# Altium PCB PCB_Oxi_VT0.1-991023.PcbDoc
Units mm, origin at the board's own origin, x right, y up, seen from the top; angles counter-clockwise.
Board outline 53 x 27 mm, 2 copper layers (Top Layer, Bottom Layer); 60 components, 54 nets, 264 pads, 84 vias.
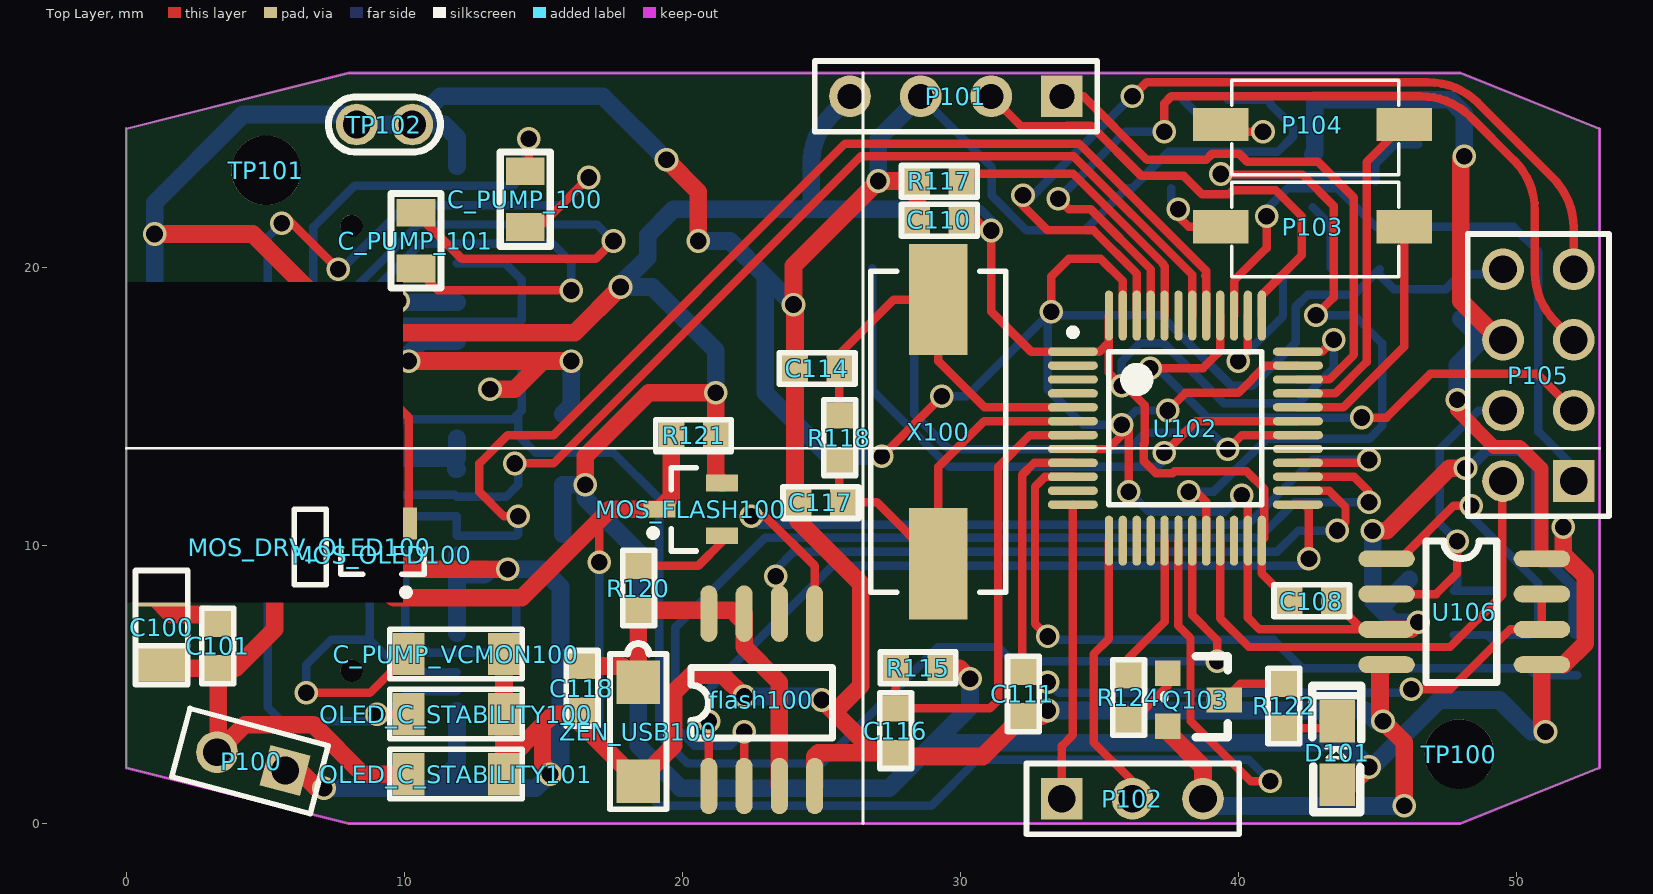
[diagram p0: Top Layer view]
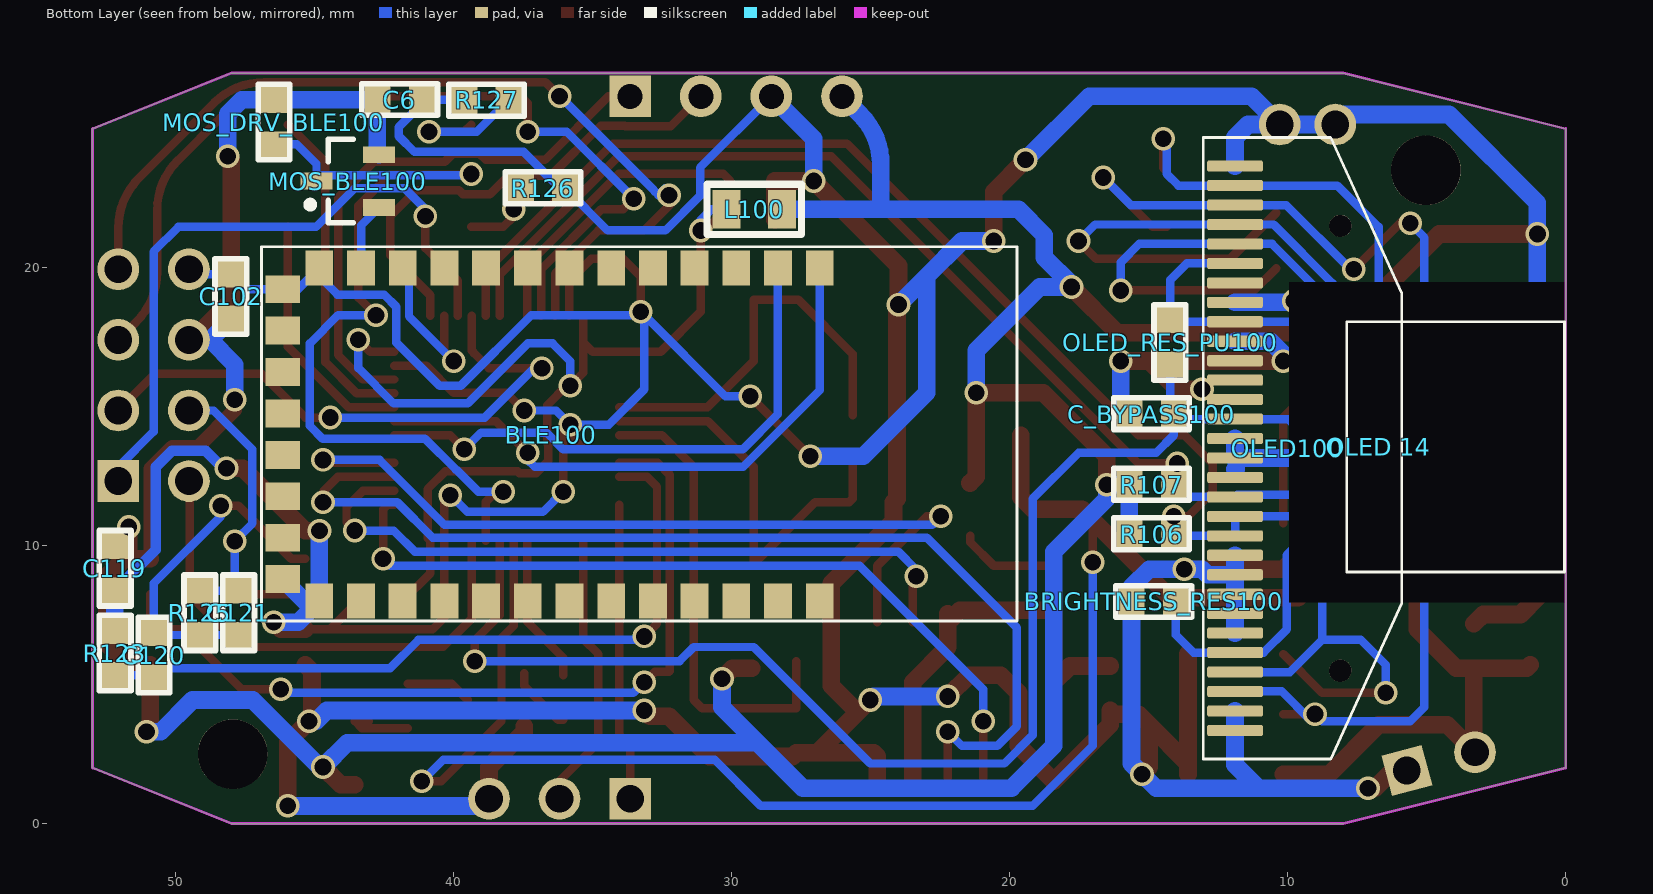
[diagram p1: Bottom Layer view, seen from below]

## Layer stack, top to bottom
Top Solder: solder mask 0.0102, Solder Resist, Dk 3.5
Top Layer: signal copper 0.0356
Dielectric 1: dielectric 0.32, FR-4, Dk 4.8
Bottom Layer: signal copper 0.0356
Bottom Solder: solder mask 0.0102, Solder Resist, Dk 3.5

## Board outline
0,2 8,0 48,0 53,2 53,25 48,27 8,27 0,25

## Design rules (kind name [scope] priority, off if disabled: settings)
AssemblyTestPointUsage [All] p1 off:
AssemblyTestpoint [All] p1 off: testpointundercomponent=TRUE minsize=1.016 maxsize=2.54 preferedsize=1.524 minholesize=0 maxholesize=1.016 preferedholesize=0.813 testpointgrid=0.025 usegrid=TRUE gridtolerance=0 allowsidetop=TRUE allowsidebottom=TRUE
Clearance [All] p1: gap=0.152 ignorepadtopadclearanceinfootprint=FALSE
ComponentClearance "OLED Clearance" [InComponent('OLED100') vs InComponent('OLED 14')] p1: gap=-2.54 collisioncheckmode=3 verticalgap=2540 showdistances=FALSE // OLED Rev diffrences
ComponentClearance [All] p2 off: gap=0.254 collisioncheckmode=3 verticalgap=0.254 showdistances=TRUE
FabricationTestPointUsage [All] p1 off: valid=0 allowmultiple=FALSE
FabricationTestpoint [All] p1 off: side=3 testpointundercomponent=TRUE minsize=1.016 maxsize=2.54 preferedsize=1.524 minholesize=0 maxholesize=1.016 preferedholesize=0.813 testpointgrid=0.025 allowsidetop=TRUE allowsidebottom=TRUE usegrid=TRUE gridtolerance=0
HoleSize [All] p1 off: absolutevalues=TRUE maxlimit=2.54 minlimit=0.025 maxpercent=80.000 minpercent=20.000
HoleToHoleClearance [All] p1 off: gap=0.254 allowstackedmicrovias=TRUE
LayerPairs [All] p1 off: enforce=TRUE
MinimumSolderMaskSliver [All] p1 off: minsoldermaskwidth=0.254
NetAntennae [All] p1 off: netantennaetolerance=0
PolygonConnect [All] p1: connectstyle=Relief reliefconductorwidth=0.254 reliefentries=4 polygonreliefangle="90 Angle" airgapwidth=0.254
RoutingVias [All] p1: holewidth=0.6 width=0.85 viastyle="Through Hole" minholewidth=0.6 minwidth=0.85 maxholewidth=0.6 maxwidth=0.85
SilkToSilkClearance [All] p1 off: silktosilkclearance=0.254
SilkToSolderMaskClearance [IsPad] p1 off: minsilkscreentomaskgap=0.254 clearancetoexposedcopper=TRUE
SolderMaskExpansion [All] p1: expansion=0.102
Width [All] p1: maxlimit=2.54 minlimit=0.254 preferedwidth=1.27
18 further rules are at their usual default settings.

## Components (designator, comment, footprint, x,y, rotation, side; value= is the part's Value field where it differs from the comment)
BLE100 "HM-16" HM-16 19.738,20.493 r270 bottom locked
BRIGHTNESS_RES100 "Res3" 0603-2 14.021,8.001 r0 bottom value=390k
C6 "1uF" 0603-2 42.748,26.035 r180 bottom
C100 "47UF 16V(B)SMD" CAP-A 1.27,5.715 r90 top
C101 "100nF" 0603-2 3.302,5.588 r90 top
C102 "100nF" 0603-2 48.006,18.161 r90 bottom
C108 "100nF" 0603-2 41.848,8.001 r0 top
C110 "100nF" 0603-2 30.048,21.717 r180 top
C111 "10nF" 0603-2 32.258,5.461 r270 top
C114 "20pF" 0603-2 25.654,16.383 r180 top
C116 "100nF" 0603-2 27.686,2.54 r90 top value=100pF
C117 "20pF" 0603-2 25.781,11.557 r180 top
C118 "100nF" 0603-2 16.383,5.664 r270 top
C119 "100nF" 0603-2 52.197,9.982 r270 bottom
C120 "1uF" 0603-2 50.8,6.858 r270 bottom
C121 "10pF" 0603-2 47.752,8.382 r270 bottom
C_BYPASS100 "Cap Semi" 0603-2 15.697,14.732 r180 bottom value=10uF
C_PUMP_100 "Cap Semi" 0805-2 14.351,21.463 r90 top value=1uF
C_PUMP_101 "Cap Semi" 0805-2 10.414,19.971 r90 top value=1uF
C_PUMP_VCMON100 "Cap Semi" 1206-2 10.16,6.096 r0 top value=10uF
D101 "LED (0805) B" 0805D 43.561,1.397 r90 top
flash100 "W25Q16BVSSIG" "SO-8 - editted" 20.955,1.549 r90 top
L100 "EBLS2012-101K" 0805-2 28.194,22.098 r0 bottom
MOS_BLE100 "FDN360P" SOT23_N 43.815,23.114 r0 bottom
MOS_DRV_BLE100 "10K" 0603-2 46.482,26.035 r270 bottom value=1K
MOS_DRV_OLED100 "10K" 0603-2 6.604,10.744 r270 top value=1K
MOS_FLASH100 "FDN360P" SOT23_N 20.302,11.303 r180 top
MOS_OLED100 "FDN360P" SOT23_N 9.21,9.67 r270 top
OLED100 "OLED" OLED0.96 10,13.5 r90 bottom locked
"OLED 14" "OLED(14pin)" OLED0.91_NO3D 6.731,17.578 r270 bottom locked
OLED_C_STABILITY100 "Cap Semi" 1206-2 10.16,3.937 r0 top value=10uF
OLED_C_STABILITY101 "Cap Semi" 1206-2 10.16,1.778 r0 top value=10uF
OLED_RES_PU100 "Res3" 0603-2 14.224,16.51 r90 bottom value=4.7k
P100 "Header 2" A_HDR1X2 5.715,1.905 r165 top
P101 "Header 4" HDR1X4 33.655,26.162 r180 top
P102 "Header 3" A_HDR1X3_editted 33.655,0.889 r0 top
P103 "Header 2" TACT-1 46.076,21.463 r180 top
P104 "Header 2" TACT-1 46.072,25.146 r180 top
P105 "Header 4X2H" HDR2X4_edited 52.07,12.319 r90 top
Q103 "BC817" SOT23 37.465,5.512 r270 top
R106 "10K" 0603-2 15.697,10.414 r180 bottom value=1K
R107 "10K" 0603-2 15.697,12.192 r180 bottom value=1K
R115 "10K" 0603-2 27.686,5.588 r0 top value=1K
R117 "10K" 0603-2 30.048,23.114 r180 top value=1K
R118 "1meg" 0603-2 25.654,14.681 r270 top value=1K
R120 "22" 0603-2 18.415,9.271 r270 top value=1K
R121 "10K" 0603-2 21.209,13.97 r180 top value=1K
R122 "100" 0603-2 41.656,3.429 r90 top value=1K
R123 "2.7k" 0603-2 52.197,6.934 r270 bottom
R124 "4.7K" 0603-2 36.068,3.734 r90 top value=1K
R125 "100k" 0603-2 49.149,8.382 r270 bottom
R126 "22" 0603-2 37.592,22.86 r180 bottom
R127 "22" 0603-2 38.024,26.035 r0 bottom
TP100 "HOLE" A_Ert#1 47.777,2.54 r0 top
TP101 "HOLE" A_Ert#2 3.708,24.384 r0 top
TP102 "HOLE" TP_Net 8.287,25.146 r0 top
U102 "STM32F103C8T6" LQFP48_N 38.1,14.224 r0 top locked
U106 "AD8572ARZ" SO-8 45.237,9.525 r0 top
X100 "8MHz" xtal 29.21,14.097 r90 top
ZEN_USB100 "5V" DSMD 18.415,1.524 r90 top

## Footprints (in the part's own frame and the unit in brackets; to place one, negate y for a bottom-side part, rotate by r counter-clockwise, add the part's x,y. Pads: shape width x height; smd on the part's side, far side on the other; paste and mask are expansions set on the pad)
0603-2 [mil]
  rect 37x40 smd: 1(0,0) 2(63,0)
  silkscreen extent -22,-22 85,23, body extent 1,-16 63,16, height 18
0805-2 [mm]
  rect 1x1.4 smd: 1(0,0) 2(2,0)
  silkscreen extent -0.7,-0.9 2.7,0.9, body extent 0,-0.58 2,0.67, height 0.5
0805D [mil]
  rect 60x50 smd: 1(0,0) 2(90,0)
  silkscreen extent -39,-35 140,36, body extent -15,-32 111,31, height 43
1206-2 [mil]
  rect 45x60 smd: 1(0,0) 2(135,0)
  silkscreen extent -27,-35 161,35, body extent 0,-31 122,30, height 22
A_Ert#1 [mm]
  round 2.5 hole 2.5: 1(0.176,-0.04)
A_Ert#2 [mm]
  round 2.5 hole 2.5: 1(1.322,-0.884)
A_HDR1X2 [mm] "Connector; Header; 4 Position"
  rect 1.5x1.5 hole 1: 1(0,0)
  round 1.5 hole 1: 2(2.54,0)
  silkscreen extent -1.27,-1.27 3.89,1.27, body extent -1.32,-1.3 3.76,1.24, height 18.51
A_HDR1X3_editted [mm] "Connector; Header; 4 Position"
  rect 1.5x1.5 hole 1: 1(0,0)
  round 1.5 hole 1: 2(2.54,0) 3(5.08,0)
  silkscreen extent -1.27,-1.27 6.38,1.27, body extent -1.19,-1.35 6.43,1.19, height 9.6
CAP-A [mm]
  rect 1.2x1.7 smd: 1(0,0) 2(2.7,0)
  silkscreen extent -0.71,-0.94 3.39,0.94, body extent -0.08,-0.69 3.12,0.91, height 1
DSMD [mil]
  rect 62x62 smd: 1(0,0) 2(140,0)
  silkscreen extent -40,-40 195,40, body extent 3,-27 149,36, height 63
HDR1X4 [mm] "Connector; Header; 4 Position"
  rect 1.5x1.5 hole 0.9: 1(0,0)
  round 1.5 hole 0.9: 2(2.54,0) 3(5.08,0) 4(7.62,0)
  silkscreen extent -1.27,-1.27 8.89,1.27
HDR2X4_edited [mm] "Connector; Header; 4x2 Position"
  rect 1.5x1.5 hole 1: 1(0,0)
  round 1.5 hole 1: 2(0,2.54) 3(2.54,0) 4(2.54,2.54) 5(5.08,0) 6(5.08,2.54) 7(7.62,0) 8(7.62,2.54)
  silkscreen extent -1.27,-1.27 8.89,3.81, body extent -1.22,-1.19 8.76,3.89, height 9.5
HM-16 [mm]
  rect 1.25x1 smd: 1(0.508,-7.1) 2(0.508,-8.6) 3(0.508,-10.1) 4(0.508,-11.6) 5(0.508,-13.1) 6(0.508,-14.6) 7(0.508,-16.1) 8(0.508,-17.6) 9(0.508,-19.1) 10(0.508,-20.6) 11(0.508,-22.1) 12(0.508,-23.6) 13(0.508,-25.1) 22(12.492,-25.1) 23(12.492,-23.6) 24(12.492,-22.11) 25(12.492,-20.6) 26(12.492,-19.1) 27(12.492,-17.6) 28(12.492,-16.1) 29(12.492,-14.6) 30(12.492,-13.1) 31(12.492,-11.6) 32(12.492,-10.1) 33(12.492,-8.6) 34(12.492,-7.1)
  rect 1x1.25 smd: 14(1.27,-26.416) 15(2.76,-26.416) 16(4.25,-26.416) 17(5.74,-26.416) 18(7.23,-26.416) 19(8.72,-26.416) 20(10.21,-26.416) 21(11.7,-26.416)
  silkscreen extent -0.25,-27.18 13.21,0
LQFP48_N [mm]
  oval 1.8x0.3 smd: 1(-4.05,2.75) 2(-4.05,2.25) 3(-4.05,1.75) 4(-4.05,1.25) 5(-4.05,0.75) 6(-4.05,0.25) 7(-4.05,-0.25) 8(-4.05,-0.75) 9(-4.05,-1.25) 10(-4.05,-1.75) 11(-4.05,-2.25) 12(-4.05,-2.75) 25(4.05,-2.75) 26(4.05,-2.25) 27(4.05,-1.75) 28(4.05,-1.25) 29(4.05,-0.75) 30(4.05,-0.25) 31(4.05,0.25) 32(4.05,0.75) 33(4.05,1.25) 34(4.05,1.75) 35(4.05,2.25) 36(4.05,2.75)
  oval 0.3x1.8 smd: 13(-2.75,-4.05) 14(-2.25,-4.05) 15(-1.75,-4.05) 16(-1.25,-4.05) 17(-0.75,-4.05) 18(-0.25,-4.05) 19(0.25,-4.05) 20(0.75,-4.05) 21(1.25,-4.05) 22(1.75,-4.05) 23(2.25,-4.05) 24(2.75,-4.05) 37(2.75,4.05) 38(2.25,4.05) 39(1.75,4.05) 40(1.25,4.05) 41(0.75,4.05) 42(0.25,4.05) 43(-0.25,4.05) 44(-0.75,4.05) 45(-1.25,4.05) 46(-1.75,4.05) 47(-2.25,4.05) 48(-2.75,4.05)
  silkscreen extent -4.17,-2.75 2.75,3.57
OLED0.91_NO3D [mm]
  rrect50% 0.32x2 smd: 1(0,0) 2(0.62,0) 3(1.24,0) 4(1.86,0) 5(2.48,0) 6(3.1,0) 7(3.72,0) 8(4.34,0) 9(4.96,0) 10(5.58,0) 11(6.2,0) 12(6.82,0) 13(7.44,0) 14(8.06,0)
  silkscreen extent -0.47,-1.14 8.53,6.69
OLED0.96 [mm]
  round 0.8 hole 0.8 unplated: 0(-8,-1.895) 0(8,-1.895)
  rrect30% 0.4x2 smd: 1(10.15,1.895) 2(9.45,1.895) 3(8.75,1.895) 4(8.05,1.895) 5(7.35,1.895) 6(6.65,1.895) 7(5.95,1.895) 8(5.25,1.895) 9(4.55,1.895) 10(3.85,1.895) 11(3.15,1.895) 12(2.45,1.895) 13(1.75,1.895) 14(1.05,1.895) 15(0.35,1.895) 16(-0.35,1.895) 17(-1.05,1.895) 18(-1.75,1.895) 19(-2.45,1.895) 20(-3.15,1.895) 21(-3.85,1.895) 22(-4.55,1.895) 23(-5.25,1.895) 24(-5.95,1.895) 25(-6.65,1.895) 26(-7.35,1.895) 27(-8.05,1.895) 28(-8.75,1.895) 29(-9.45,1.895) 30(-10.15,1.895)
  silkscreen extent -11.18,-4.11 11.18,3.04, body extent -12.84,-4.84 12.86,17.57, height 0.21
SO-8 [mil]
  oval 80x24 smd: 1(4,0) 2(4,-50) 3(4,-100) 4(4,-150) 5(224,-150) 6(224,-100) 7(224,-50) 8(224,0)
  silkscreen extent 60,-175 160,25, body extent -5,-173 239,24, height 69
"SO-8 - editted" [mil]
  oval 80x24 smd: 1(-7.87,0) 2(-7.87,-50) 3(-7.87,-100) 4(-7.87,-150) 5(236.22,-150) 6(236.22,-100) 7(236.22,-50) 8(236.22,0)
  silkscreen extent 60,-175 160,25, body extent -5,-173 239,24, height 69
SOT23 [mil]
  rect 36x36 smd: 1(4,0) 2(79,0)
  rect 36x50 smd: 3(42,80)
  silkscreen extent -20,-5 95,85
SOT23_N [mm] "SOT23, 3-Leads, Body 2.9x1.3mm, Pitch 0.95mm, Lead Span 2.3mm - Reverse Pinning, IPC Medium Density"
  rect 1.15x0.6 smd: 1(1.125,0) 2(-1.125,-0.95) 3(-1.125,0.95)
  silkscreen extent -0.2,-1.5 1.48,1.5, body extent -0.7,-1.5 0.7,1.5, height 1.1
TACT-1 [mm]
  rect 2x1.2 smd: 1(0.102,0) 2(6.702,0)
  silkscreen extent 0.3,-1.6 6.3,1.8, body extent -0.67,-1.77 7.33,1.83, height 2.4
TP_Net [mm]
  round 1.5 hole 1: 0(0,0) 0(2,0)
  silkscreen extent -1.02,-0.99 3.01,0.99
xtal [mm] "Crystal, 2-Leads, Body 4.70x11.40mm, Pitch 8.80mm, IPC Medium Density"
  rect 4x2.1 smd: 1(-4.75,0) 2(4.75,0)
  silkscreen extent -5.77,-2.42 5.77,2.42, body extent -6.35,-2.35 6.35,2.35, height 4.2

## Part data
BRIGHTNESS_RES100 OLED_RES_PU100: "Resistor", LatestRevisionDate=29-May-2009, LatestRevisionNote="IPC-7351 Footprint Added.", PackageDescription="Chip Resistor", PackageReference=J1-0603, Published=8-Jun-2000, Publisher="Altium Limited"
C6 C101 C102 C108 C110 C111 C114 C116 C117 C118 C119 C120 C121: library part CAP, "Capacitor"
  C116: Published=8-Jun-2000, Publisher="Altium Limited", Revision="July-2002: Re-released for DXP Platform."
C100: library part CAPACITOR, "TAJD106M035RNJ"
C_BYPASS100 C_PUMP_100 C_PUMP_101 C_PUMP_VCMON100 OLED_C_STABILITY100 OLED_C_STABILITY101: "Capacitor (Semiconductor SIM Model)", LatestRevisionDate=29-May-2009, LatestRevisionNote="IPC-7351 Footprint Added.", PackageDescription="Chip Capacitor", PackageReference=C1206, Published=8-Jun-2000, Publisher="Altium Limited"
D101: library part LED3, "Typical BLUE SiC LED", PackageDocument=16-Apr-2002, DatasheetDocument=16-Apr-2002, LatestRevisionDate=17-Dec-2003, LatestRevisionNote="PCB Footprint replaced.", PackageReference=3.5X2.8X1.9, Published=8-Jun-2000, Publisher="Altium Limited"
flash100: "FLASH - NOR Memory IC 16Mb _2M x 8_ SPI 104MHz 8-SOIC", Package="SOIC-8 Winbond", Availability=Unavailable, MF=Winbond, MP=W25Q16BVSSIG, Price=None, SnapEDA_Link=https://www.snapeda.com/parts/W25Q16BVSSIG/Winbond%20Electronics/view-part/512685/?ref=snap
L100: library part INDUCTOR, "Inductor 100UH (0805)", GLFR1608T100M-LR=10UH
MOS_BLE100 MOS_FLASH100 MOS_OLED100: library part MOSFET-P, "P-Channel MOSFET", LatestRevisionDate=17-Jul-2002, LatestRevisionNote="Re-released for DXP Platform.", PackageDescription="TO, Flat Index; 3 In-Line, Axial Leads; Body Dia. 4.6mm; Lead Dia. 0.5 mm (max)", PackageReference=E3, PackageVersion=1995/1996, Published=8-Jun-2000, Publisher="Altium Limited"
MOS_DRV_BLE100 MOS_DRV_OLED100 R115 R120 R121: library part res1, "Resistor", Published=8-Jun-2000, Publisher="Altium Limited", Revision="July-2002: Re-released for DXP Platform."
OLED100: library part OLED0.96
P100 P103 P104: "Header, 2-Pin", LatestRevisionDate=17-Jul-2002, LatestRevisionNote="Re-released for DXP Platform.", Publisher="Altium Limited"
P101: "Header, 4-Pin", LatestRevisionDate=17-Jul-2002, LatestRevisionNote="Re-released for DXP Platform.", Publisher="Altium Limited"
P102: "Header, 3-Pin", LatestRevisionDate=17-Jul-2002, LatestRevisionNote="Re-released for DXP Platform.", Publisher="Altium Limited"
P105: "Header, 4-Pin, Dual row, Right Angle", LatestRevisionDate=17-Jul-2002, LatestRevisionNote="Re-released for DXP Platform.", Publisher="Altium Limited"
Q103: library part 2N3904, "NPN General Purpose Amplifier", ComponentLink1Description="Manufacturer Link", ComponentLink1URL=http://www.fairchildsemi.com/, ComponentLink2Description=Datasheet, ComponentLink2URL=http://www.fairchildsemi.com/ds/2N%2F2N3904.pdf, DatasheetVersion=1997, LatestRevisionDate=15-Jan-2003, LatestRevisionNote="PCB Footprint 'BCY-W3/D4.7' replaced", PackageDescription="TO, Flat Index; 3 In-Line, Axial Leads; Body Dia. 4.5mm; Leads 0.51 x 0.48 mm (max)", PackageReference=TO-92A, PackageVersion=Sep-1998, Published=8-Jun-2000, Publisher="Altium Limited"
R106 R107 R117 R118 R122 R124: library part Res1, "Resistor", Published=8-Jun-2000, Publisher="Altium Limited", Revision="July-2002: Re-released for DXP Platform."
R123 R125 R126 R127: library part RES1
TP100 TP101 TP102: library part TP
U102: "STM32 ARM-based 32-bit MCU with 64 Kbytes Flash, 48-pin LQFP, Industrial Temperature"
U106: library part NJM3404
X100: library part CRYSTAL, "NTK-8.000000-HC49US"
ZEN_USB100: library part ZENER

## Free pads (board coordinates)
  round 0 hole 11.5 square: "OLED Hole"(4.191,13.716)

## Via types
v1: diameter 0.85, hole 0.6, Top Layer to Bottom Layer, 84 vias

## Nets (pads, with @x,y where several pads share a name; then routed paths per layer and width w, separated by ;. In a path a pad name is that pad's centre, name@x,y a point inside that pad or via, vN(x,y) a via of type N, cw(c..) or ccw(c..) an arc to the next point about the centre after c; other vN are vias at no path point)
BOOT0: R117.1 U102.44 | length 10.6
  Top Layer w0.305: R117.1 30.302,23.368 34.072,23.368 37.307,20.133 37.307,20.097 37.35,20.054 U102.44
BUILTIN_LED: R124.2 U102.17 | length 5.4
  Top Layer w0.305: R124.2 36.068,5.969 37.35,7.251 U102.17
CPU_RXD: P102.2 U102.13 | length 10.1
  Top Layer w0.305: U102.13 35.35,6.648 34.798,6.096 34.798,2.921 36.195,1.524 P102.2
CPU_TXD: P102.1 U102.12 | length 10.7
  Top Layer w0.305: P102.1 33.655,2.794 34.05,3.189 U102.12
CS_FLASH: flash100.1 U102.25 | length 29
  Top Layer w0.305: flash100.1@20.955,1.651 v1(20.955,3.683) ; U102.25 42.374,11.474 42.545,11.303 v1(42.545,9.525)
  Bottom Layer w0.305: v1(20.955,3.683) 20.955,4.826 25.403,9.274 26.338,9.274 26.341,9.271 42.291,9.271 v1(42.545,9.525)
DAC_Sync_1: P105.5 U102.45 | length 32.5
  Top Layer w0.305: v1(33.528,22.479) 33.909,22.098 34.695,22.098 36.85,19.943 U102.45 ; v1(37.338,24.892) 37.338,25.908 37.592,26.162 46.573,26.162 cw(c46.573,23.622) 47.48,25.995 cw(c46.573,23.622) 48.369,25.418 49.929,23.858 cw(c48.133,22.062) 50.673,22.062 50.673,19.848 ccw(c53.213,19.848) 51.417,18.052 P105.5
  Bottom Layer w0.305: v1(33.528,22.479) 35.941,24.892 v1(37.338,24.892)
DAC_Sync_2: P105.7 U102.46 | length 32.9
  Top Layer w0.305: v1(32.258,22.606) 32.258,22.479 32.131,22.352 33.147,21.336 34.798,21.336 36.35,19.784 U102.46 ; v1(36.195,26.162) 36.703,26.67 46.827,26.67 cw(c46.827,24.13) 48.623,25.926 51.326,23.223 cw(c49.53,21.427) 52.07,21.427 P105.7
  Bottom Layer w0.305: v1(32.258,22.606) 32.258,22.733 32.385,22.86 32.639,22.606 32.798,22.765 32.798,22.781 36.179,26.162 v1(36.195,26.162)
DAC_Sync_3: P105.2 U102.21 | length 18.3
  Top Layer w0.305: U102.21 39.35,7.386 40.386,6.35 47.625,6.35 49.505,8.23 49.505,12.294 P105.2
f_MISO: flash100.2 U102.27 | length 38.2
  Top Layer w0.305: flash100.2@22.225,1.651 v1(22.225,3.302) ; U102.27 44.168,12.474 44.704,11.938 v1(44.704,11.557)
  Bottom Layer w0.305: v1(22.225,3.302) 21.717,2.794 20.447,2.794 19.748,3.492 19.748,7.048 22.987,10.287 40.767,10.287 42.037,11.557 v1(44.704,11.557)
f_MOSI: flash100.5 U102.28 | length 31
  Top Layer w0.305: v1(22.479,11.049) 22.987,11.049 24.765,9.271 flash100.5 flash100.5@24.765,7.239 ; U102.28 44.597,12.974 v1(44.704,13.081)
  Bottom Layer w0.305: v1(22.479,11.049) 22.784,10.744 40.335,10.744 42.672,13.081 v1(44.704,13.081)
f_SCK: flash100.6 U102.26 | length 25.7
  Top Layer w0.305: v1(23.368,8.89) 23.495,8.763 flash100.6 flash100.6@23.495,7.239 ; U102.26 43.271,11.974 43.86,11.385 43.86,10.84 v1(43.561,10.541)
  Bottom Layer w0.305: v1(23.368,8.89) 23.368,9.144 24.003,9.779 41.402,9.779 42.164,10.541 v1(43.561,10.541)
GND: "OLED 14.7" BLE100.13 BLE100.14 BLE100.21 BLE100.22 BRIGHTNESS_RES100.2 C6.2 C100.2 C101.2 C102.2 C108.2 C110.2 C111.2 C114.2 C116.1 C117.2 C118.2 C119.2 C_BYPASS100.1 C_PUMP_VCMON100.2 flash100.4 OLED100.1 OLED100.8 OLED100.10 OLED100.12 OLED100.13 OLED100.15 OLED100.16 OLED100.17 OLED100.21 OLED100.22 OLED100.23 OLED100.24 OLED100.25 OLED100.29 OLED100.30 OLED_C_STABILITY100.2 OLED_C_STABILITY101.2 P100.1 P101.3 P102.3 P105.8 Q103.2 R117.2 R123.1 R126.2 R127.2 TP102.0 U102.8 U102.23 U102.35 U102.47 U106.3 U106.4 ZEN_USB100.1 | length 329.5
  Top Layer w0.305: v1(27.178,13.208) v1(29.337,15.367) ; v1(33.274,18.415) 33.274,19.685 33.909,20.32 35.052,20.32 35.85,19.522 U102.47 ; U102.8 35.318,13.474 v1@35.941,14.097 ; v1(36.068,11.938) v1@36.068,14.224 ; v1(37.465,14.859) 38.1,15.494 40.005,15.494 40.985,16.474 U102.35 ; v1(40.132,11.811) 40.259,11.811 40.35,11.72 U102.23 40.35,7.402 40.767,6.985 U106.3@44.464,6.985 ; C108.2 U106.3@44.464,6.985 ; U106.3 U106.3@44.464,6.985
  Top Layer w0.635: C100.2@1.001,8.146 1.625,7.521 2.969,7.521 C101.2 ; v1(1.016,11.176) 1.27,10.922 C100.2 ; v1(1.016,21.209) 4.544,21.209 6.957,18.796 v1(9.779,18.796) ; P100.1 6.223,1.905 6.858,1.27 v1(7.112,1.27) ; v1(13.081,15.621) 13.97,15.621 14.986,16.637 ; OLED_C_STABILITY101.2 OLED_C_STABILITY101.2@13.589,2.159 ; C_PUMP_VCMON100.2 OLED_C_STABILITY100.2 OLED_C_STABILITY101.2@13.589,2.159 ; v1(13.716,9.144) 10.115,9.144 10.115,9.18 9.271,10.024 9.39,10.143 9.39,12.819 v1(9.398,12.827) 8.128,14.097 8.128,15.875 8.89,16.637 v1(10.16,16.637) 14.986,16.637 ; v1(15.24,1.778) 14.986,2.032 14.986,3.556 ; v1(16.002,16.637) 14.986,16.637 ; v1(19.431,23.876) 20.574,22.733 v1(20.574,20.955) ; v1(22.225,4.572) 21.463,5.334 20.32,5.334 19.685,4.699 19.685,2.794 ZEN_USB100.1 16.383,3.556 C118.2 16.256,3.937 15.367,3.937 14.986,3.556 ; flash100.4 24.765,2.413 24.892,2.54 26.924,2.54 ; v1(25.019,4.445) 25.463,4 ; C110.2 R117.2 v1(27.051,23.114) 24.003,20.066 v1(24.003,18.669) 24.054,18.618 C114.2 24.054,11.684 C117.2 24.181,10.871 26.416,8.636 26.416,4.953 25.463,4 ; v1(33.147,4.064) 32.944,3.861 C111.2 30.81,2.413 27.813,2.413 C116.1 26.924,2.54 ; Q103.2 37.465,3.302 38.735,2.032 P102.3 ; v1(44.831,10.527) 45.339,10.527 47.595,12.783 v1(48.177,12.783) ; U106.4 45.104,5.48 45.104,3.791 v1(45.212,3.683) 45.974,2.921 v1(45.974,0.635) ; U106.3 U106.3@46.228,6.985 ; OLED_C_STABILITY101.2@13.589,2.159 14.986,3.556 ; 25.463,4 26.924,2.54
  Bottom Layer w0.305: 6.731,13.858 8.27,13.858 v1(8.509,14.097) ; P101.3 31.139,23.598 31.139,22.582 32.385,21.336 34.468,21.336 R126.2 36.195,22.86 36.817,23.482 36.817,23.494 37.485,24.162 41.414,24.162 41.979,24.727 41.979,25.057 41.567,25.469 41.148,25.888 C6.2 R127.2 ; v1(29.337,15.367) 30.226,15.367 v1@33.147,18.288 ; v1(36.068,11.938) 36.798,11.208 39.509,11.208 40.112,11.811 v1(40.132,11.811) ; v1(37.465,14.859) 36.322,14.859 v1(35.814,14.351) 34.417,14.351 33.147,15.621 v1@33.147,18.288 ; BLE100.13@45.085,19.939 BLE100.13@44.984,19.838 ; P105.8 49.352,19.761 C102.2 47.468,19.223 BLE100.14 45.6,19.223 BLE100.13@44.984,19.838 ; v1@33.147,18.288 v1(33.274,18.415) 33.401,18.288 37.211,18.288 39.751,15.748 40.513,15.748 42.069,17.304 42.069,18.59 42.497,19.018 44.196,19.018 44.196,19.05 BLE100.13@44.984,19.838
  Bottom Layer w0.381: v1(48.177,12.783) 48.305,12.783 48.934,13.412 50.14,13.412 50.725,12.827 50.725,9.854 C119.2
  Bottom Layer w0.635: v1(1.016,11.176) v1(1.016,21.209) 1.016,22.327 4.196,25.507 7.926,25.507 8.287,25.146 TP102.0@10.287,25.146 ; v1(7.112,1.27) 11.049,1.27 ; v1(9.398,12.827) 9.721,13.15 OLED100.16 ; v1(9.779,18.796) 9.825,18.75 OLED100.8 ; v1(10.16,16.637) 10.16,16.891 10.619,17.35 OLED100.10 ; OLED100.29 OLED100.30 11.895,2.116 11.049,1.27 ; OLED100.25 OLED100.24 OLED100.23 OLED100.22 ; OLED100.21 OLED100.22 ; 11.895,12.743 11.854,12.743 11.854,13.109 OLED100.16 ; OLED100.15 OLED100.16 ; OLED100.1 11.895,24.681 11.43,25.146 TP102.0@10.287,25.146 ; C_BYPASS100.1 16.002,15.037 v1(16.002,16.637) ; v1(19.431,23.876) 17.145,26.162 11.303,26.162 TP102.0@10.287,25.146 ; v1(20.574,20.955) 21.717,20.955 22.987,19.685 ; v1(22.225,4.572) 24.892,4.572 v1(25.019,4.445) ; v1(24.003,18.669) 22.987,19.685 ; v1(27.051,23.114) 27.051,24.638 P101.3 ; v1(27.178,13.208) 25.273,13.208 22.987,15.494 22.987,19.685 ; v1(33.147,4.064) 44.577,4.064 v1@44.958,3.683 ; P102.3 38.995,0.629 39.757,0.629 ; 39.751,0.635 39.757,0.629 ; v1@44.838,10.527 BLE100.22 ; v1(45.974,0.635) 45.968,0.629 39.757,0.629 ; BLE100.21 45.362,8.001 BLE100.22 ; v1(46.482,7.239) 45.6,7.239 BLE100.22 ; R123.1 C119.2 ; 11.049,1.27 14.732,1.27 v1(15.24,1.778) 15.621,2.159 BRIGHTNESS_RES100.2 15.621,8.509 14.986,9.144 v1(13.716,9.144) 13.081,9.144 12.887,8.95 OLED100.22
Key1: P103.1 U102.32 | length 9
  Top Layer w0.305: U102.32 43.787,14.974 44.148,15.335 44.152,15.335 45.974,17.157 P103.1
Key2: P104.1 U102.33 | length 12
  Top Layer w0.305: U102.33 43.494,15.474 44.621,16.601 44.621,23.797 P104.1
NetBRIGHTNESS_RES100_1: "OLED 14.12" BRIGHTNESS_RES100.1 OLED100.26 | length 12.2
  Bottom Layer w0.305: 6.731,10.758 8.927,10.758 10.033,9.652 10.033,6.985 10.868,6.15 OLED100.26 13.389,6.15 14.021,6.782 BRIGHTNESS_RES100.1
NetC120_1: C120.1 C121.2 R125.2 U106.1 | length 12.2
  Top Layer w0.305: U106.1 45.847,9.525 47.752,11.43 v1(48.387,11.43)
  Bottom Layer w0.305: C121.2 48.971,6.782 R125.2@49.149,6.604 ; v1(48.387,11.43) 48.387,11.049 50.8,8.636 C120.1 ; R125.2 C120.1@50.444,6.782
NetC_PUMP_100_1: "OLED 14.2" C_PUMP_100.1 OLED100.3 | length 22.5
  Top Layer w0.305: v1(5.588,21.59) 5.715,21.59 5.842,21.717 v1(7.62,19.939) ; C_PUMP_100.1 14.859,21.463 v1(16.637,23.241)
  Bottom Layer w0.305: v1(5.588,21.59) 5.08,21.082 5.08,17.399 5.521,16.958 6.731,16.958 ; v1(7.62,19.939) 7.747,19.939 10.058,22.25 OLED100.3 15.646,22.25 v1(16.637,23.241)
NetC_PUMP_100_2: "OLED 14.1" C_PUMP_100.2 OLED100.2 | length 14.8
  Top Layer w0.305: C_PUMP_100.2 14.478,23.59 v1(14.478,24.638)
  Bottom Layer w0.305: 6.731,17.578 6.731,21.463 8.218,22.95 OLED100.2 13.933,22.95 14.351,23.368 14.351,24.511 v1(14.478,24.638)
NetC_PUMP_101_1: "OLED 14.4" C_PUMP_101.1 OLED100.5 | length 20.2
  Top Layer w0.305: C_PUMP_101.1 11.208,19.177 v1(16.002,19.177)
  Bottom Layer w0.305: 6.731,15.718 8.098,15.718 8.89,16.51 8.89,19.177 10.563,20.85 OLED100.5 15.345,20.85 16.002,20.193 v1(16.002,19.177)
NetC_PUMP_101_2: "OLED 14.3" C_PUMP_101.2 OLED100.4 | length 22.7
  Top Layer w0.305: C_PUMP_101.2 12.065,20.32 16.891,20.32 v1(17.526,20.955)
  Bottom Layer w0.305: 6.731,16.338 7.829,16.338 8.382,16.891 8.382,19.431 10.501,21.55 OLED100.4 16.931,21.55 v1(17.526,20.955)
NetC_PUMP_VCMON100_1: "OLED 14.13" C_PUMP_VCMON100.1 OLED100.27 | length 16.7
  Top Layer w0.305: v1(6.477,4.699) 8.763,4.699 C_PUMP_VCMON100.1
  Bottom Layer w0.305: v1(6.477,4.699) 6.477,5.715 7.366,6.604 8.763,6.604 ; 6.731,10.138 8.023,10.138 8.763,9.398 8.763,6.604 ; OLED100.27 9.917,5.45 8.763,6.604
NetD101_2: D101.2 R122.1 | length 2.5
  Top Layer w0.305: R122.1 43.307,3.429 D101.2 D101.2@43.053,3.683
NetMOS_FLASH100_3: MOS_FLASH100.3 R120.1 | length 3.6
  Top Layer w0.305: R120.1 20.574,9.271 21.427,10.124 MOS_FLASH100.3
NetP103_2: P103.2 R126.1 | length 3
  Top Layer w0.305: v1(37.846,22.098) 37.846,21.844 38.227,21.463 P103.2
  Bottom Layer w0.305: R126.1 37.592,22.098 v1(37.846,22.098)
NetP104_2: P104.2 R127.1 | length 5
  Top Layer w0.305: P104.2 39.624,24.892 v1(40.894,24.892)
  Bottom Layer w0.305: R127.1 39.167,24.892 v1(40.894,24.892)
NetQ103_1: Q103.1 R124.1 | length 2.5
  Top Layer w0.305: R124.1@35.814,3.937 R124.1@35.992,3.937 ; R124.1 36.246,3.734 37.465,4.953 Q103.1
NetQ103_3: Q103.3 R122.2 | length 2.4
  Top Layer w0.305: Q103.3 40.081,5.029 R122.2
NRST: C116.2 R115.1 U102.7 | length 17
  Top Layer w0.305: R115.1@27.686,5.842 R115.1 C116.2 31.064,4.14 31.369,4.445 31.369,12.827 32.516,13.974 U102.7
OLED_RES: "OLED 14.9" C_BYPASS100.2 OLED100.14 OLED_RES_PU100.1 U102.19 | length 52.5
  Top Layer w0.305: U102.19 38.35,7.493 39.243,6.6 v1(39.243,5.842)
  Bottom Layer w0.305: 6.731,12.618 8.062,12.618 9.994,14.55 OLED100.14 13.915,14.55 C_BYPASS100.2 ; OLED_RES_PU100.1 14.224,14.859 C_BYPASS100.2 ; v1(39.243,5.842) 31.877,5.842 31.369,6.35 29.21,6.35 25.019,2.159 20.192,2.159 19.177,3.174 19.177,11.684 17.526,13.335 14.732,13.335 14.097,13.97 C_BYPASS100.2
OSC_In: C114.1 R118.1 U102.5 X100.2 | length 14.3
  Top Layer w0.305: R118.1 C114.1 25.654,16.891 27.61,18.847 X100.2 29.21,16.637 30.873,14.974 U102.5
OSC_Out: C117.1 R118.2 U102.6 X100.1 | length 14.9
  Top Layer w0.305: R118.2 25.654,11.684 C117.1 27,11.557 X100.1 29.21,12.827 30.857,14.474 U102.6
PLEDK: C121.1 P105.4 R125.1 U106.2 | length 13
  Top Layer w0.305: U106.2@45.974,8.255 47.117,8.255 47.879,9.017 v1(47.879,10.16)
  Bottom Layer w0.305: R125.1 C121.1 47.879,8.509 v1(47.879,10.16) 47.244,10.795 47.244,13.462 48.641,14.859 P105.4
PWR_BLE: MOS_BLE100.1 MOS_DRV_BLE100.2 U102.20 | length 32.5
  Top Layer w0.305: v1(38.227,11.938) 38.481,11.938 38.85,11.569 U102.20 ; v1@39.649,23.349 42.31,23.349 43.434,22.225 43.434,18.923 v1(42.799,18.288)
  Bottom Layer w0.305: v1(38.227,11.938) 39.116,11.938 39.91,12.732 39.926,12.732 41.037,13.843 44.72,13.843 45.18,14.303 45.18,17.272 44.164,18.288 v1(42.799,18.288) ; v1(39.37,23.368) 39.421,23.317 44.737,23.317 MOS_BLE100.1 44.94,23.731 45.644,24.435 MOS_DRV_BLE100.2
PWR_OLED: MOS_DRV_OLED100.2 MOS_FLASH100.1 MOS_OLED100.1 R121.2 U102.18 | length 61.6
  Top Layer w0.305: 16.828,10.731 17.018,10.541 v1(17.018,9.398) ; U102.18 37.85,7.108 38.285,6.673 38.285,3.683 40.444,1.524 v1(41.148,1.524)
  Top Layer w0.635: MOS_DRV_OLED100.2 7.203,8.545 MOS_OLED100.1 9.627,8.128 14.224,8.128 16.828,10.731 17.399,11.303 MOS_FLASH100.1 19.609,11.735 R121.2
  Bottom Layer w0.305: v1(17.018,9.398) 17.018,2.794 19.177,0.635 28.956,0.635 30.607,2.286 40.386,2.286 v1(41.148,1.524)
PWR_PER: U102.43
RST_BLE: BLE100.11 U102.38 | length 5.9
  Top Layer w0.305: v1(40.005,16.637) 40.35,16.982 U102.38
  Bottom Layer w0.305: v1(40.005,16.637) 41.612,18.244 41.612,19.759 BLE100.11
RX_BLE: BLE100.1 U102.31 | length 21.7
  Top Layer w0.305: v1(37.338,13.335) 38.477,14.474 U102.31
  Bottom Layer w0.305: BLE100.1 26.838,15.58 29.591,12.827 37.084,12.827 37.338,13.081 v1(37.338,13.335)
SCK: P105.3 U102.40 | length 21.2
  Top Layer w0.305: v1(36.83,16.383) 38.735,16.383 39.275,16.923 39.275,16.939 39.35,17.014 U102.40 ; v1(44.45,14.605) 45.339,14.605 46.917,16.183 50.746,16.183 P105.3
  Bottom Layer w0.305: v1(36.83,16.383) 37.108,16.383 38.886,14.605 v1(44.45,14.605)
SCL: "OLED 14.10" OLED100.18 R107.2 U102.42 | length 41
  Top Layer w0.305: v1(13.97,12.954) 15.367,12.954 26.416,24.003 34.083,24.003 38.35,19.736 U102.42
  Bottom Layer w0.305: 7.047,11.97 6.759,11.97 6.731,11.998 8.89,11.998 9.053,11.835 11.81,11.835 OLED100.18 13.655,11.75 R107.2 14.097,12.827 v1(13.97,12.954)
SDA: "OLED 14.11" OLED100.19 OLED100.20 R106.2 U102.41 | length 46.1
  Top Layer w0.305: v1(14.097,11.049) 13.589,11.049 12.7,11.938 12.7,12.954 13.716,13.97 15.367,13.97 25.857,24.46 34.273,24.46 38.85,19.883 38.85,19.685 ; 38.807,19.713 38.822,19.713 38.85,19.685 ; U102.41 38.85,19.685
  Bottom Layer w0.305: 6.731,11.378 8.954,11.378 9.282,11.05 OLED100.19 OLED100.20 14.033,10.35 R106.2 v1(14.097,11.049)
SDI: P105.1 U102.39 | length 24.1
  Top Layer w0.305: U102.39 39.85,19.53 41.021,20.701 v1(41.021,21.844)
  Bottom Layer w0.305: v1(41.021,21.844) 41.021,22.098 41.783,22.86 43.561,22.86 44.958,21.463 49.911,21.463 50.8,20.574 50.8,14.097 52.07,12.827 P105.1
SWCLK: P101.2 U102.37 | length 17.3
  Top Layer w0.305: P101.2 32.199,25.078 33.829,25.078 33.847,25.095 34.722,25.095 36.512,23.304 38.036,23.304 38.703,22.638 39.672,22.638 39.825,22.791 41.344,22.791 42.291,21.844 42.291,20.447 40.85,19.006 U102.37
SWDIO: P101.1 U102.34 | length 20.2
  Top Layer w0.305: P101.1 34.437,26.162 36.723,23.876 38.846,23.876 39.068,24.098 40.037,24.098 40.328,23.807 42.868,23.807 44.164,22.511 44.164,16.859 43.279,15.974 U102.34
TX_BLE: BLE100.2 U102.30 | length 20.3
  Top Layer w0.305: v1(39.624,13.462) 40.136,13.974 U102.30
  Bottom Layer w0.305: BLE100.2 28.338,14.727 29.603,13.462 36.068,13.462 36.671,14.065 39.021,14.065 v1(39.624,13.462)
VCC: C6.1 C100.1 C101.1 C102.1 C119.1 D101.1 L100.1 MOS_BLE100.2 MOS_DRV_BLE100.1 MOS_DRV_OLED100.1 MOS_FLASH100.2 MOS_OLED100.2 OLED_C_STABILITY101.1 P100.2 P101.4 P105.6 R106.1 R107.1 R115.2 R121.1 U106.5 U106.8 | length 164.7
  Top Layer w0.508: v1(47.879,15.24) 47.879,14.875 49.202,13.551 50.127,13.551 50.914,12.765 50.914,9.538 U106.8
  Top Layer w0.635: C100.1 1.397,5.588 C101.1 ; P100.2 P100.2@3.302,2.603 ; MOS_OLED100.2 8.209,10.744 MOS_DRV_OLED100.1 6.045,10.744 5.334,10.033 ; OLED_C_STABILITY101.1 8.509,1.778 6.731,3.556 4.255,3.556 P100.2@3.302,2.603 ; v1(16.51,12.192) 16.51,13.208 18.796,15.494 v1(21.209,15.494) R121.1 21.209,12.471 MOS_FLASH100.2 ; v1(17.78,19.304) 16.129,17.653 8.636,17.653 5.334,14.351 5.334,10.033 ; R115.2 29.972,5.588 v1(30.353,5.207) ; D101.1 44.069,1.397 v1(44.704,2.032) ; v1(48.133,24.003) 48.006,23.876 48.006,18.796 49.403,17.399 P105.6 ; U106.8 U106.8@51.845,9.525 ; v1(51.054,3.302) 50.927,3.429 U106.5 51.718,5.715 52.48,6.477 52.48,8.89 U106.8@51.845,9.525 ; v1(51.689,10.668) 51.689,9.681 U106.8@51.845,9.525 ; P100.2@3.302,2.603 C101.1 ; C101.1 3.937,5.588 5.334,6.985 5.334,10.033
  Bottom Layer w0.635: R106.1 R107.1 v1(16.51,12.192) 16.51,11.684 18.415,9.779 18.415,2.794 19.939,1.27 27.438,1.27 29.076,2.908 ; v1(21.209,15.494) 21.209,17.018 18.923,19.304 v1(17.78,19.304) 17.78,19.391 18.753,20.363 18.753,21.166 19.685,22.098 24.638,22.098 ; P101.4 25.382,25.509 ccw(c27.178,23.713) 24.638,23.713 24.638,22.098 ; L100.1 24.638,22.098 ; v1(30.353,5.207) 30.353,4.185 29.076,2.908 ; MOS_BLE100.2 42.748,24.122 C6.1 MOS_DRV_BLE100.1 47.625,26.035 48.133,25.527 v1(48.133,24.003) ; v1(47.879,15.24) 47.879,16.51 48.768,17.399 C102.1 ; v1(51.054,3.302) 50.546,3.302 49.403,4.445 47.24,4.445 44.827,2.032 v1(44.704,2.032) 43.828,2.908 29.076,2.908
VCC_BLT: BLE100.12 MOS_BLE100.3 | length 2.4
  Bottom Layer w0.305: MOS_BLE100.3 43.338,21.516 BLE100.12
VCC_FLASH: C118.1 flash100.3 flash100.7 flash100.8 R120.2 ZEN_USB100.2 | length 15.4
  Top Layer w0.635: C118.1 17.831,5.664 ZEN_USB100.2 R120.2 21.793,7.671 flash100.7@22.07,7.394 ; flash100.7 22.225,6.35 23.495,5.08 flash100.3
VCC_OLED: "OLED 14.5" "OLED 14.8" "OLED 14.14" MOS_OLED100.3 OLED100.6 OLED100.9 OLED100.28 OLED_C_STABILITY100.1 OLED_RES_PU100.2 | length 43.7
  Top Layer w0.305: v1(9.017,3.937) OLED_C_STABILITY100.1 ; v1(9.525,15.24) 10.16,14.605 MOS_OLED100.3
  Bottom Layer w0.305: 6.731,9.518 5.468,9.518 5.08,9.906 ; 6.731,13.238 5.618,13.238 5.08,12.7 ; v1(9.017,3.937) 8.763,3.683 5.588,3.683 5.08,4.191 5.08,9.906 ; v1@9.207,3.746 10.211,4.75 OLED100.28 ; v1(9.525,15.24) 9.017,15.24 8.7,15.557 ; OLED100.6 13.632,20.15 14.224,19.558 OLED_RES_PU100.2 14.164,18.05 OLED100.9 9.795,18.05 9.43,17.685 9.43,16.288 8.7,15.557 ; 5.08,9.906 5.08,12.7 ; 5.08,12.7 5.08,14.605 5.573,15.098 6.731,15.098 8.24,15.098 8.7,15.557
VCPU: C108.1 C110.1 L100.2 U102.1 U102.24 U102.36 U102.48 | length 38.4
  Top Layer w0.305: C110.1 30.587,21.717 30.968,21.336 v1(31.115,21.336) 31.115,18.415 32.556,16.974 U102.1 35.008,16.974 35.35,17.316 ; U102.48 35.35,17.316 ; C108.1 40.85,8.999 U102.24 40.945,10.269 40.945,12.03 40.307,12.668 37.703,12.668 37.64,12.605 37.036,12.605 36.608,13.033 36.608,13.637 36.645,13.674 36.645,15.044 35.941,15.748 v1(35.814,15.748) 35.35,16.212 35.35,17.316 ; U102.36 43.009,16.974 v1(43.434,17.399)
  Bottom Layer w0.305: L100.2 30.734,22.098 31.115,21.717 v1(31.115,21.336) ; v1(35.814,15.748) 35.814,16.637 36.449,17.272 37.338,17.272 39.497,15.113 42.164,15.113 43.434,16.383 v1(43.434,17.399)
VCPU_A: C111.1 U102.9 U106.6 U106.7 | length 30.3
  Top Layer w0.305: v1(33.147,5.08) 32.766,5.461 C111.1 32.233,5.486 32.233,12.548 32.659,12.974 U102.9 ; v1(46.228,4.826) 47.625,4.826 49.784,6.985 U106.6 U106.7
  Bottom Layer w0.305: v1(33.147,5.08) 33.163,5.08 33.544,4.699 46.101,4.699 v1(46.228,4.826)
Vout_LED1: U102.14
Vout_LED2: U102.15
Vout_LED3: U102.16
Vout_PLED: C120.2 R123.2 U102.10 | length 26.7
  Top Layer w0.305: v1(33.147,6.731) 32.69,7.188 32.69,12.116 33.048,12.474 U102.10
  Bottom Layer w0.305: v1(33.147,6.731) 33.274,6.604 41.275,6.604 42.291,5.588 50.47,5.588 C120.2 ; C120.2@50.8,5.334 R123.2
pads on no net: "OLED 14.6" BLE100.3 BLE100.4 BLE100.5 BLE100.6 BLE100.7 BLE100.8 BLE100.9 BLE100.10 BLE100.15 BLE100.16 BLE100.17 BLE100.18 BLE100.19 BLE100.20 BLE100.23 BLE100.24 BLE100.25 BLE100.26 BLE100.27 BLE100.28 BLE100.29 BLE100.30 BLE100.31 BLE100.32 BLE100.33 BLE100.34 OLED100.0 OLED100.7 OLED100.11 TP100.1 TP101.1 U102.2 U102.3 U102.4 U102.11 U102.22 U102.29

## Keep-outs
Keep-Out Layer:
  the board outline again, w0.1

## Silkscreen, mask and mechanical layers (free items; w line width, h text height)
Top Overlay:
  lines w0.1: 0,13.5 53,13.5 ; 26.5,0 26.5,27